# Altium PCB Nicla_BME688_ANNA_pcb.PcbDoc
Units mm, origin at the board's own origin, x right, y up, seen from the top; angles counter-clockwise.
Board outline 28.27 x 24.44 mm, 2 copper layers (Top Layer, Bottom Layer); 37 components, 28 nets, 159 pads, 82 vias.
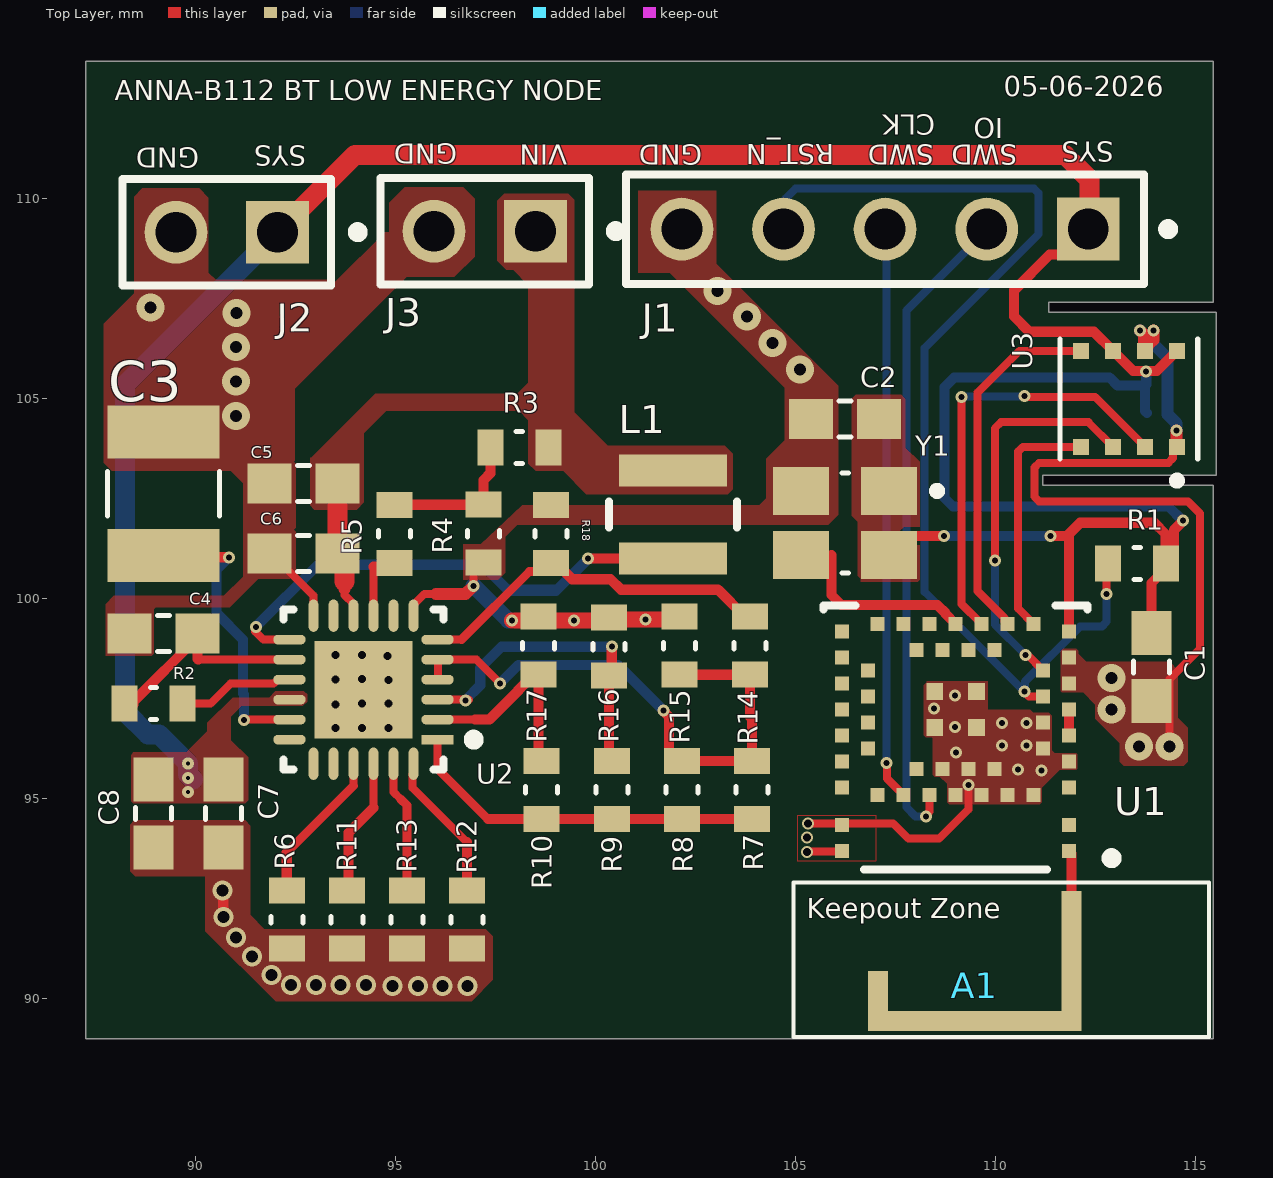
[diagram p0: Top Layer view]
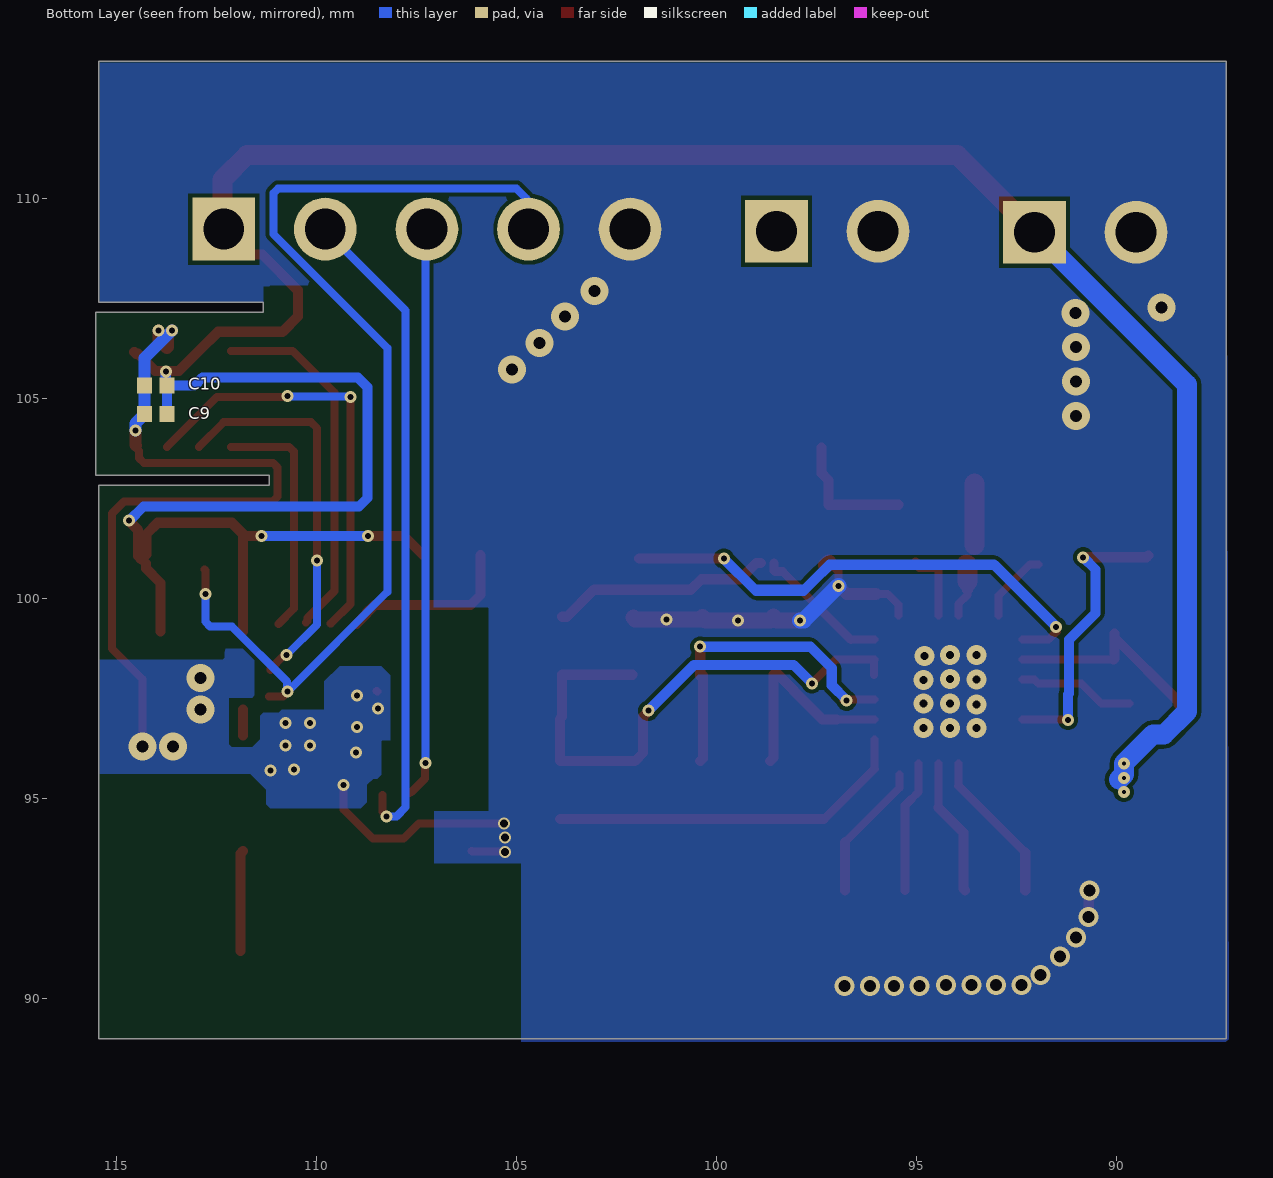
[diagram p1: Bottom Layer view, seen from below]
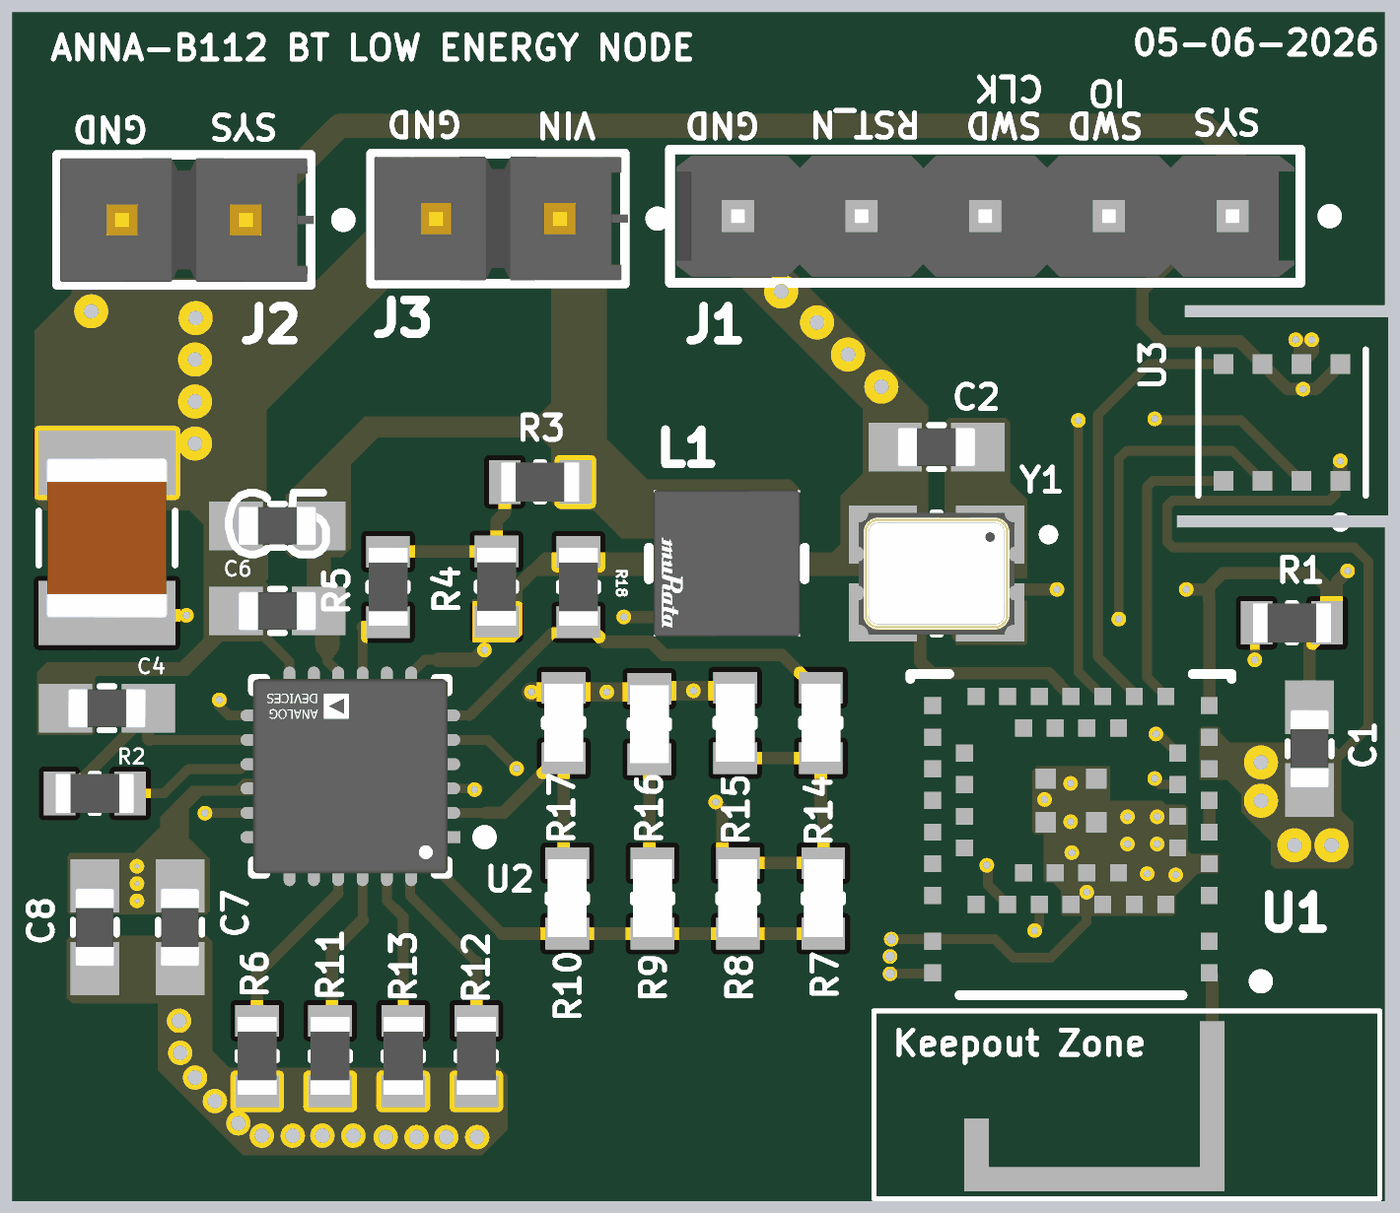
[diagram p2: 3D render of the assembled board from above, using the file's embedded part models]

## Layer stack, top to bottom
Top Solder: solder mask 0.0102, Solder Resist, Dk 3.5
Top Layer: signal copper 0.0356
Dielectric 1: dielectric 0.32, FR-4, Dk 4.8
Bottom Layer: signal copper 0.0356
Bottom Solder: solder mask 0.0102, Solder Resist, Dk 3.5

## Board outline
87.25,89 87.25,113.436 115.443,113.436 115.443,107.417 111.328,107.417 111.328,107.163 115.519,107.163 115.519,103.099 111.176,103.099 111.176,102.845 115.443,102.845 115.443,89

## Design rules (kind name [scope] priority, off if disabled: settings)
Clearance [All] p1: gap=0.1 ignorepadtopadclearanceinfootprint=FALSE except(0.2: Arc-Arc Arc-Track Track-Track)
ComponentClearance [All] p1: gap=0.2 collisioncheckmode=3 verticalgap=0.2 showdistances=FALSE
PlaneConnect [All] p1: planeconnectstyle=Direct reliefexpansion=0.508 reliefentries=4 reliefconductorwidth=0.254 reliefairgap=0.254
PolygonConnect [All] p1: connectstyle=Direct reliefconductorwidth=0.254 reliefentries=4 polygonreliefangle="90 Angle" airgapwidth=0.254
RoutingVias [All] p1: holewidth=0.15 width=0.3 viastyle="Through Hole" minholewidth=0.1 minwidth=0.254 maxholewidth=0.7 maxwidth=0.7
SMDNeckDown [All] p1: percent=90.000
ShortCircuit [All] p1: allowed=TRUE
SolderMaskExpansion [All] p1: expansion=0 istentingtop=FALSE
SupplyNets "Schematic Supply Nets_1" [InNet('GND')] p1: voltage=0.000
SupplyNets "Schematic Supply Nets" [InNet('SYS')] p2: voltage=0.000
UnRoutedNet [All] p1: checkbadconnections=TRUE
Width [All] p1: maxlimit=0.5 minlimit=0.1 preferedwidth=0.254 minimp=50.000000 maximp=50.000000 favimp=50.000000
26 further rules are at their usual default settings.

## Components (designator, comment, footprint, x,y, rotation, side; value= is the part's Value field where it differs from the comment)
A1 "AntennaStripANNA_B112" ChipAntennaANNAB112 109,88.1 r0 top
C1 "100n" CAPC1608X90 113.9,98.3 r90 top
C2 "100n" CAPC1608X90 106.238,104.5 r0 top
C3 "220u" CAPC3325X152N 89.198,102.631 r90 top
C4 "10u" CAPC1608X90 89.198,99.131 r0 top
C5 "0u1" CAPC1608X90 92.698,102.881 r180 top
C6 "4u7" CAPC1608X90 92.698,101.131 r180 top
C7 "4u7" CAPC1608X90 90.698,94.631 r270 top
C8 "0u1" CAPC1608X90 88.948,94.631 r270 top
C9 "100n" CAPC0603X33N 114.021,104.623 r180 bottom
C10 "100n" CAPC0603X33N 114.021,105.334 r180 bottom
J1 "22-28-4050" FP-22-28-4050-MFG 107.239,109.245 r180 top
J2 "TSW-102-12-T-S" FP-TSW-102-12-T-S-MFG 90.78,109.169 r180 top
J3 "TSW-102-12-T-S" FP-TSW-102-12-T-S-MFG 97.231,109.195 r180 top
L1 "22uH" FP-LQH3NPH_ME-MFG 101.93,102.108 r270 top
R1 "10K" RES_ERJU03J682V 113.538,100.889 r0 top
R2 "0K" RES_ERJU03J682V 88.948,97.381 r0 top
R3 "4.7M" RES_ERJU03J682V 98.095,103.784 r180 top
R4 "18M" RES_ERJU03J682V 97.198,101.631 r270 top
R5 "0K" RES_ERJU03J682V 94.971,101.625 r90 top
R6 "1K" RES_ERJU03J682V 92.284,91.984 r270 top
R7 "6M19" RES_ERJU03J682V 103.911,95.225 r90 top
R8 "5M9" RES_ERJU03J682V 102.159,95.225 r90 top
R9 "6M04" RES_ERJU03J682V 100.406,95.225 r90 top
R10 "5M9" RES_ERJU03J682V 98.654,95.225 r90 top
R11 "0K" RES_ERJU03J682V 93.784,91.984 r270 top
R12 "0K" RES_ERJU03J682V 96.784,91.984 r90 top
R13 "0K" RES_ERJU03J682V 95.284,91.984 r90 top
R14 "100K" RES_ERJU03J682V 103.861,98.831 r90 top
R15 "4M12" RES_ERJU03J682V 102.1,98.831 r90 top
R16 "4M02" RES_ERJU03J682V 100.338,98.806 r90 top
R17 "4M12" RES_ERJU03J682V 98.577,98.831 r90 top
R18 "4.7M" RES_ERJU03J682V 98.882,101.625 r90 top
U1 "ANNA-B112-00B" FP-ANNA-B112-00B-0 109,96.535 r180 top
U2 "ADP5091ACPZ-1-R7" FP-CP-24-14-IPC_C 94.198,97.732 r180 top
U3 "BME688" IC_BME688 113.335,105.004 r270 top
Y1 "S31805T-32.768K-R" OSC_S31805T-32.768K-R 106.238,101.9 r180 top

## Footprints (in the part's own frame and the unit in brackets; to place one, negate y for a bottom-side part, rotate by r counter-clockwise, add the part's x,y. Pads: shape width x height; smd on the part's side, far side on the other; paste and mask are expansions set on the pad)
CAPC0603X33N [mm]
  rect 0.38x0.4 smd: 1(-0.281,0) 2(0.281,0)
  body extent -0.3,-0.15 0.3,0.15, height 0.33
CAPC1608X90 [mm]
  rect 1.1x1 smd: 1(-0.85,0) 2(0.85,0)
  silkscreen extent -0.15,-0.45 0.15,0.45, body extent -0.8,-0.4 0.8,0.4, height 0.9
CAPC3325X152N [mm]
  rect 1.32x2.81 smd paste+0 mask+0.102: 1(-1.542,0) 2(1.542,0)
  silkscreen extent -0.56,-1.4 0.56,1.4, body extent -1.65,-1.25 1.65,1.25, height 1.52
ChipAntennaANNAB112 [mm] "chip antenna for internal antenna of ANNA-B112 when the chip is mounted on the corner"
  rect 0.5x1.5 smd: 1(-1.94,1.851)
  rect 4.84x0.5 smd: 1(0.73,1.351)
  rect 0.5x3 smd: 1(2.9,3.1)
FP-22-28-4050-MFG [mm]
  rect 1.57x1.57 hole 1.02 paste-2539.97 mask+0: 1(-5.08,0)
  round 1.57 hole 1.02 paste-2539.97 mask+0: 2(-2.54,0) 3(0,0) 4(2.54,0) 5(5.08,0)
  silkscreen extent -7.2,-1.37 6.47,1.37, body extent -6.58,-1.47 6.58,1.47, height 0.25
FP-ANNA-B112-00B-0 [mm]
  rect 0.35x0.35 smd paste+0 mask+0: 1(-2.84,2.84) 2(-2.84,2.19) 3(-2.84,1.248) 4(-2.84,0.598) 5(-2.84,-0.052) 6(-2.84,-0.702) 7(-2.84,-1.352) 8(-2.84,-2.002) 9(-2.84,-2.652) 10(-2.19,0.273) 11(-2.19,-0.377) 12(-2.19,-1.027) 13(-2.19,-1.677) 14(-1.95,-2.84) 15(-1.3,-2.84) 16(-0.65,-2.84) 17(0,-2.84) 18(0.65,-2.84) 19(1.3,-2.84) 20(1.95,-2.84) 21(-0.975,-2.19) 22(-0.325,-2.19) 23(0.325,-2.19) 24(0.975,-2.19) 25(2.84,-2.652) 26(2.84,-2.002) 27(2.84,-1.352) 28(2.84,-0.702) 29(2.84,-0.052) 30(2.84,0.598) 31(2.84,1.248) 32(2.84,2.19) 33(2.84,2.84) 34(2.19,-1.677) 35(2.19,-1.027) 36(2.19,-0.377) 37(2.19,0.273) 38(1.95,1.435) 39(1.3,1.435) 40(0.65,1.435) 41(0,1.435) 42(-0.65,1.435) 43(-1.3,1.435) 44(-1.95,1.435) 45(0.975,0.785) 46(0.325,0.785) 47(-0.325,0.785) 48(-0.975,0.785)
  rect 0.42x0.42 smd paste+0 mask+0: 49(-0.52,-0.252) 50(-0.52,-1.152) 51(0.52,-1.152) 52(0.52,-0.252)
  silkscreen extent -4.03,-3.3 3.3,3.3
FP-CP-24-14-IPC_C [mm]
  rect 0.81x0.242 smd paste+0 mask+0: 1(-1.851,1.25)
  rrect100% 0.81x0.242 smd paste+0 mask+0: 2(-1.851,0.75) 3(-1.851,0.25) 4(-1.851,-0.25) 5(-1.851,-0.75) 6(-1.851,-1.25) 13(1.851,-1.25) 14(1.851,-0.75) 15(1.851,-0.25) 16(1.851,0.25) 17(1.851,0.75) 18(1.851,1.25)
  rrect100% 0.242x0.81 smd paste+0 mask+0: 7(-1.25,-1.851) 8(-0.75,-1.851) 9(-0.25,-1.851) 10(0.25,-1.851) 11(0.75,-1.851) 12(1.25,-1.851) 19(1.25,1.851) 20(0.75,1.851) 21(0.25,1.851) 22(-0.25,1.851) 23(-0.75,1.851) 24(-1.25,1.851)
  rect 2.44x2.44 smd paste-1000 mask+0: 25(0,0)
  silkscreen extent -2.88,-2 2,2, body extent -2.36,-2.36 2.36,2.36, height 0.25
FP-LQH3NPH_ME-MFG [mm]
  rect 0.8x2.7 smd paste+0 mask+0: 1(-1.1,0) 2(1.1,0)
  silkscreen extent -0.32,-1.6 0.33,1.6, body extent -1.7,-1.7 1.7,1.7, height 0.25
FP-TSW-102-12-T-S-MFG [mm]
  rect 1.57x1.57 hole 1.02 paste-2539.97 mask+0: 1(-1.27,0)
  round 1.57 hole 1.02 paste-2539.97 mask+0: 2(1.27,0)
  silkscreen extent -3.4,-1.34 2.61,1.33, body extent -2.71,-1.44 2.71,1.44, height 0.25
IC_BME688 [mm]
  rect 0.4x0.4 smd: 1(1.2,1.2) 2(1.2,0.4) 3(1.2,-0.4) 4(1.2,-1.2) 5(-1.2,-1.2) 6(-1.2,-0.4) 7(-1.2,0.4) 8(-1.2,1.2)
  silkscreen extent -1.5,-1.72 2.14,1.72
OSC_S31805T-32.768K-R [mm]
  rect 1.4x1.2 smd: 1(-1.1,-0.8) 2(1.1,-0.8) 3(1.1,0.8) 4(-1.1,0.8)
  silkscreen extent -2.4,-1.25 0.08,1.25, body extent -1.6,-1.25 1.6,1.25, height 1.2
RES_ERJU03J682V [mm]
  rect 0.65x0.9 smd paste+0 mask+0.102: 1(-0.725,0) 2(0.725,0)
  silkscreen extent -0.08,-0.4 0.08,0.4, body extent -0.8,-0.4 0.8,0.4, height 0.45

## Part data
A1: "Schematic for Antenna Strip for ANNA-B112 INTERNAL Antenna when chip is mounted on corner"
C1 C2 C4 C5 C6 C7 C8 C9 C10: library part CC0603KRX7R9BB151, "CAPACITOR, 0603, 150PF, 50V; Capacitor Application:General Purpose; Dielectric Characteristic:X7R; Capacitance:150pF; Capacitance Tolerance:Â± 10%; Voltage Rating:50V; Capacitor Case Style:0603; Capacitor Mounting:SMD; Operating Temperature Range:-55Â°C t", Package="0603 Yageo", Check_prices=https://www.snapeda.com/parts/CC0603KRX7R9BB151/Yageo/view-part/?ref=eda, MF=Yageo, MP=CC0603KRX7R9BB151, SnapEDA_Link=https://www.snapeda.com/parts/CC0603KRX7R9BB151/Yageo/view-part/?ref=snap
C3: library part CC0603KRX7R9BB151, "1210", Package="0603 Yageo", Check_prices=https://www.snapeda.com/parts/CC0603KRX7R9BB151/Yageo/view-part/?ref=eda, MF=Yageo, MP=CC0603KRX7R9BB151, SnapEDA_Link=https://www.snapeda.com/parts/CC0603KRX7R9BB151/Yageo/view-part/?ref=snap
J1: library part CMP-00257-00278173-1, "22-28-4050 KK® 254 Breakaway Header, Vertical, 5 Circuits, Tin (Sn) Plating, Mating Pin Length 6.09mm", Color=Black, Contact Resistance=20mΩ, Current Rating=4A, Flammability Rating="UL94 V-0", Max Operating Temperature=75°C, Max Voltage Rating (DC)=250.25kV, Min Operating Temperature=0°C, Voltage Rating=250V, Connector Type="Male Pin", Contact Material=Brass, Contact Mating Length=6.096mm, Contact Plating=Tin, Gender=Male, Glow Wire Compliant=Non-compliant, Height=2.29mm, Housing Color=Black, Housing Material=Thermoplastic, Lead Free="Lead Free", Lead Pitch=2.54mm, Length=12.7mm, Mount="Through Hole", NexarPartId=278173, Number of Circuits=5, Number Of Contacts=5, Number of Positions=5, Number of Rows=1, Orientation=Vertical, Packaging=Bulk, Pitch=2.54mm, Radiation Hardening=No, REACH SVHC=Unknown, RoHS=Compliant, Schedule B=8536694040, Termination=Solder, Voltage Rating (DC)=250V, Width=2.49mm
J2 J3: library part CMP-02766-001444-1, "CONN HEADER VERT 2POS 2.54MM", Contact Material=Bronze, Contact Plating=Tin, Gender=Male, Mount="Through Hole", Number Of Contacts=2, Number of Rows=1, Packaging=Bulk, Pitch=2.54mm, Radiation Hardening=No, REACH SVHC="No SVHC", RoHS Compliant=Yes, Termination=Solder
L1: library part CMP-06042-009111-1, "Wire Wound Ferrite Inductor for Power Lines For Automotive 22μH ±20% 0.48Ω 860mA 1212", Case Code (Imperial)=1212, Case Code (Metric)=3030, Current Rating=860mA, DC Resistance (DCR)=480mR, Max Operating Temperature=85°C, Min Operating Temperature=-40°C, Ratings=AEC-Q200, Resistor Type=Wirewound, Saturation Current=570mA, Self Resonant Frequency=10MHz, Test Frequency=1MHz, Tolerance=20%, Case/Package=1212, Core Material=Ferrite, Inductance=22uH, Mount="Surface Mount", Packaging="Cut Tape", Shielding=Shielded
R1 R2 R5 R6 R11 R12 R13: library part ERJU02J364X, Package=None, Availability=Unavailable, MP=ERJU02J364X, Price=None
R3 R4 R7 R8 R9 R10 R14 R15 R16 R17 R18: library part ERJU02J364X, "0603", Package=None, Availability=Unavailable, MP=ERJU02J364X, Price=None
U1: library part CMP-207130-000009-1, "RF RECEIVER GFSK 2.4GHZ", Manufacturer=U-Blox, Max Frequency=2.4GHz, Max Supply Voltage=3.6V, Min Supply Voltage=1.7V, Nominal Supply Current=3.7mA, Package=SMD_MD_6MM5_6MM5, Receiving Current=5.4mA, Temperature="-40°C to +85°C", Temperature Range High=+85°C, Temperature Range Low=-40°C, Transmitting Current=5.3mA, Automotive=No, Category=UNK, ComponentLink2Description=Datasheet, ComponentLink2URL=https://www.u-blox.com/sites/default/files/ANNA-B112_DataSheet_%28UBX-18011707%29.pdf, Data Rate=2Mbits/s, Device Class L1="Integrated Circuits (ICs)", Device Class L2="RF Semiconductors and Devices", Device Class L3=Transceivers, Digikey Description="RF RECEIVER GFSK 2.4GHZ", Height=1.25mm, Interface=I2C,SPI,UART,I2S, Lead Free=Yes, Manufacturer Part Number=ANNA-B112-00B, Number Of Adc Channels=8, Number Of Gpio=25, Octopart=https://octopart.com/anna-b112-00b-u-blox-97577862, RoHS=TRUE, Sensitivity=-91dBm
U2: library part CMP-09132-000010-1, "IC BATT CHG MULTI-CHEM 24LFCSP", Manufacturer="Analog Devices Inc.", Max Supply Voltage=3.3V, Min Supply Voltage=0.08V, Nominal Supply Current=0.51-0.76uA, Output Current=150mA, Output Voltage=1.5-3.6V, Package=CP-24-14, Temperature="-40°C to +125°C", Temperature Range High=+125°C, Temperature Range Low=-40°C, Automotive=No, Category=IC, ComponentLink2Description=Datasheet, ComponentLink2URL=https://www.analog.com/media/en/technical-documentation/data-sheets/ADP5091-5092.pdf, Device Class L1="Integrated Circuits (ICs)", Device Class L2="Power Management ICs", Device Class L3="Battery Management", Digikey Description="IC BATT CHG MULTI-CHEM 24LFCSP", Height=0.8mm, Ipc Land Pattern Name=QFN50P400X400X75-24, Lead Free=Yes, Manufacturer Part Number=ADP5091ACPZ-1-R7, Mouser Description="Ultralow Power Energy Harvester PMU with MPPT and Charge Management", Octopart=https://octopart.com/adp5091acpz-1-r7-analog+devices-71032930, RoHS=TRUE, Standoff Height=0.02mm
U3: "Gas sensor measuring relative humidity, barometric pressure, ambient temperature and gas (VOC)", Package=None, Availability=Unavailable, MP=BME688, Price=None
Y1: Package=None, Availability=Unavailable, MP=S31805T-32.768K-R, Price=None

## Via types
v1: diameter 0.3, hole 0.15, Top Layer to Bottom Layer, 38 vias
v2: diameter 0.7, hole 0.3, Top Layer to Bottom Layer, 13 vias
v3: diameter 0.5, hole 0.3, Top Layer to Bottom Layer, 13 vias
v4: diameter 0.5, hole 0.2, Top Layer to Bottom Layer, 12 vias
v5: diameter 0.3, hole 0.1, Top Layer to Bottom Layer, 3 vias
v6: diameter 0.3, hole 0.2, Top Layer to Bottom Layer, 3 vias

## Nets (pads, with @x,y where several pads share a name; then routed paths per layer and width w, separated by ;. In a path a pad name is that pad's centre, name@x,y a point inside that pad or via, vN(x,y) a via of type N, cw(c..) or ccw(c..) an arc to the next point about the centre after c; other vN are vias at no path point)
ANT_INT: U1.5 U1.6 | length 0.6
  Top Layer w0.254: U1.5 U1.6
ANT_Strip: U1.1 | length 2.5
  Top Layer w0.254: U1.1 111.9,93.635 111.9,91.2
CS_BME: U1.16 U3.2 | length 11
  Top Layer w0.2: v1(109.15,105.049) 109.15,99.875 109.634,99.391 U1.16@109.651,99.391 ; v1(110.719,105.08) 110.744,105.054 112.484,105.054 U3.2
  Bottom Layer w0.2: v1(109.15,105.049) 109.166,105.064 110.703,105.064 v1(110.719,105.08)
DIS_SW: R11.1 U2.22 | length 3.4
  Top Layer w0.2: 94.448,94.779 U2.22
  Top Layer w0.254: R11.1 93.825,92.75 93.825,94.155 94.448,94.779
GND: C1.1 C2.1 C3.2 C4.1 C5.2 C6.2 C7.2 C8.2 C9.1 C10.1 J1.5 J2.2 J3.2 R4.2 R6.2 R11.2 R12.1 R13.1 R15.2 R16.2 R17.2 R18.2 U1.4 U1.7 U1.8 U1.10 U1.11 U1.32 U1.33 U1.41 U1.42 U1.43 U1.44 U1.46 U1.47 U1.48 U1.49 U1.50 U1.51 U1.52 U2.7 U2.12 U2.25 U3.1 U3.7 Y1.2 | length 35.9
  Top Layer w0.2: C6.2@91.948,100.863 92.166,100.863 92.948,100.081 U2.12 ; U2.7 95.448,99.856 95.719,100.127 96.012,100.127 ; v1(96.952,100.33) 96.952,100.681 97.177,100.906 R4.2 ; v6(105.283,93.675) 105.289,93.681 106.101,93.681 U1.33@106.121,93.701 ; v6(105.308,94.386) 107.442,94.386 107.823,94.005 108.585,94.005 109.322,94.742 109.322,95.326 v1@109.347,95.352 ; U1.51 U1.51@108.494,97.701 ; v2@114.325,96.418 114.351,96.444 114.351,97.993 115.113,98.755 115.113,102.133 114.808,102.438 111.09,102.438 110.973,102.555 110.973,103.286 111.09,103.403 114.318,103.403 114.435,103.521 114.435,103.704 U3.1
  Top Layer w0.254: v3(90.678,92.71) 90.691,92.697 90.691,92.062 v3(90.703,92.05)
  Top Layer w0.3: 96.012,100.127 96.749,100.127 v1@96.926,100.305 ; v1(113.614,106.705) 113.716,106.604 U3.7@113.716,106.299 ; U3.7@113.741,106.274 113.944,106.477 v1(113.944,106.705) ; U3.1@114.51,103.835 114.529,103.854 v1(114.529,104.216)
  Top Layer w0.4: R4.2 R4.2@97.257,100.848 ; v1(97.917,99.466) 98.487,99.466 R17.2 ; R17.2@98.603,99.531 98.667,99.466 v1(99.466,99.466) 100.274,99.466 R16.2@100.351,99.544 ; R16.2 100.378,99.492 102.035,99.492 R15.2@102.074,99.531
  Bottom Layer w0.3: v1(113.614,106.705) 114.302,106.018 C10.1 C9.1@114.302,104.65 ; C9.1 114.302,104.613 114.529,104.386 v1(114.529,104.216)
  Bottom Layer w0.4: v1(96.952,100.33) 97.815,99.466 v1(97.917,99.466)
  other v1: 109.322,95.352 111.15,95.707 110.566,95.733 109.017,96.164 110.16,96.342 110.769,96.342 108.991,96.799 110.16,96.901 110.769,96.901 108.458,97.257 108.991,97.587 101.244,99.492
  other v2: 113.589,96.317 114.351,96.317 112.903,97.231 112.903,98.019 91.008,104.572 91.008,105.435 105.105,105.74 91.008,106.299 104.419,106.401 103.784,107.061 91.021,107.15 88.875,107.29 103.048,107.696
  other v3: 94.923,90.318 95.558,90.318 96.168,90.318 96.803,90.318 92.38,90.348 93.015,90.348 93.624,90.348 94.259,90.348 91.897,90.602 91.415,91.059 91.008,91.542
  other v4: 93.497,96.774 94.158,96.774 94.818,96.774 93.497,97.367 94.158,97.384 94.818,97.384 94.818,97.968 93.497,97.985 94.158,97.993 94.793,98.577 93.497,98.603 94.158,98.603
  other v6: 105.283,94.031
MINOP: R6.1 U2.21 | length 3.9
  Top Layer w0.2: 93.948,95.333 U2.21
  Top Layer w0.218: 92.278,93.662 93.948,95.333
  Top Layer w0.254: 92.278,93.662 92.278,92.709 R6.1
MISO_BME: U1.15 U3.5 | length 9.1
  Top Layer w0.2: U1.15@110.266,99.416 110.259,99.416 110.225,99.45 110.225,99.525 109.55,100.2 109.55,105.156 110.598,106.204 U3.5
MOSI_BME: U1.13 U3.3 | length 9.8
  Top Layer w0.2: v1(109.982,100.965) 109.982,104.267 110.134,104.419 112.319,104.419 U3.3 ; v1(110.744,98.603) 110.763,98.584 110.818,98.584 111.15,98.252 U1.13@111.15,98.222
  Bottom Layer w0.2: v1(109.982,100.965) 109.982,99.365 v1(110.744,98.603)
MPPT: R5.1 U2.9 | length 1.8
  Top Layer w0.2: U2.9 94.448,100.804
  Top Layer w0.254: 94.448,100.804 94.919,100.804 R5.1@95.021,100.906
MPPT_VOLTAGE_DIVIDER: R3.2 R4.1 R5.2 | length 3.2
  Top Layer w0.254: 95.448,102.356 R4.1 97.198,102.972 97.37,103.143 R3.2
REF: R7.1 R8.1 R9.1 R10.1 U2.1 | length 9.1
  Top Layer w0.2: 96.05,95.757 U2.1
  Top Layer w0.218: 96.05,95.757 97.307,94.5
  Top Layer w0.254: 97.307,94.5 R10.1 R9.1 R8.1 R7.1
REG_D0: R12.2 U2.24 | length 3.5
  Top Layer w0.2: U2.24@95.428,95.606 95.428,95.275 96.784,93.919
  Top Layer w0.254: R12.2 96.784,93.919
REG_D1: R13.2 U2.23 | length 3.3
  Top Layer w0.2: U2.23 94.948,95.176 95.117,95.007
  Top Layer w0.218: 95.117,95.007 95.284,94.841 R13.2
REG_FB: R2.2 U2.15 | length 2.9
  Top Layer w0.2: R2.2 90.375,97.381 90.876,97.882 91.952,97.882 92.052,97.982 U2.15
REG_OUT: C4.2 R2.1 U2.14 | length 5.5
  Top Layer w0.2: 90.068,98.482 U2.14
  Top Layer w0.254: R2.1 88.223,97.358 88.443,97.358 88.443,97.429 C4.2@90.048,99.035 ; C4.2 C4.2@90.048,99.035 ; 90.068,98.482 90.048,98.502 C4.2@90.048,99.035
RESET_N: J1.4 R1.1 U1.12 | length 25.9
  Top Layer w0.2: v1(110.719,97.688) 110.719,97.679 110.836,97.562 U1.12 ; v1(112.776,100.127) 112.776,100.711 R1.1@112.801,100.736
  Bottom Layer w0.2: J1.4@104.75,110.007 105.004,110.261 108.001,110.261 ; 108.026,110.261 110.957,110.261 111.074,110.144 111.074,109.118 108.229,106.274 108.229,100.178 v1(110.719,97.688) 110.738,97.708 110.738,97.936 112.116,99.314 112.659,99.314 112.776,99.431 v1(112.776,100.127)
SCLK_BME: U1.14 U3.4 | length 6.1
  Top Layer w0.2: U1.14 110.566,99.759 110.566,103.686 110.683,103.804 U3.4
SETBK: R9.2 R16.1 U2.3 | length 8.3
  Top Layer w0.2: U2.3 v1@96.822,97.482
  Top Layer w0.218: v1(96.749,97.46) 96.774,97.46 96.797,97.482 v1@96.822,97.482
  Top Layer w0.254: R9.2 100.338,96.017 R16.1 100.406,98.081 v1(100.406,98.806)
  Bottom Layer w0.254: v1(96.749,97.46) 96.749,97.472 97.117,97.84 97.117,98.272 97.65,98.806 v1(100.406,98.806)
SETHYST: R14.2 R18.1 U2.6 | length 9
  Top Layer w0.2: U2.6 96.646,98.982
  Top Layer w0.218: 96.646,98.982 98.348,100.685 98.541,100.685 98.564,100.707 R18.1@98.564,100.9
  Top Layer w0.254: R18.1 99.007,100.9 99.413,100.494 100.373,100.494 100.639,100.228 103.064,100.228 103.736,99.556 R14.2
SETPG: R7.2 R8.2 R14.1 R15.1 U2.4 U2.5 | length 14.1
  Top Layer w0.2: U2.4@96.063,98.095 96.063,98.469 U2.5 97.021,98.482 v1@97.561,97.942
  Top Layer w0.254: v1(101.702,97.206) 101.702,97.193 101.836,97.059 101.836,96.148 102.034,95.95 R7.2 103.911,97.003 103.861,97.053 R14.1 R15.1
  Bottom Layer w0.254: v1(97.612,97.892) 98.073,98.352 100.555,98.352 v1(101.702,97.206)
SETSD: R10.2 R17.1 U2.2 | length 5.2
  Top Layer w0.2: U2.2 96.982,96.982
  Top Layer w0.254: 96.982,96.982 97.345,96.982 98.066,97.704 98.066,97.72 98.452,98.106 R17.1 98.577,96.026 R10.2
SUPERCAP: C3.1 U2.17 | length 7.3
  Top Layer w0.2: v1(91.211,96.977) 91.217,96.982 U2.17
  Top Layer w0.254: C3.1 89.246,101.041 v1(90.83,101.041)
  Bottom Layer w0.254: v1(90.83,101.041) 90.526,100.736 90.526,99.644 91.186,98.984 91.186,97.635 91.211,97.61 v1(91.211,96.977)
SW: L1.2 U2.13 | length 14.1
  Top Layer w0.2: v1@91.491,99.187 91.695,98.982 U2.13
  Top Layer w0.254: v1(99.814,101.008) L1.2
  Bottom Layer w0.254: v1(91.507,99.305) 93.059,100.857 97.17,100.857 97.586,100.441 ; 99.009,100.203 97.824,100.203 97.586,100.441 ; v1(99.814,101.008) 99.035,100.228 97.799,100.228 97.586,100.441
SWDCLK: J1.3 U1.39 | length 14.3
  Top Layer w0.2: v1(107.271,95.905) 107.29,95.886 107.29,95.51 107.625,95.175 107.644,95.175 U1.39@107.671,95.148
  Bottom Layer w0.2: J1.3 107.271,109.214 v1(107.271,95.905)
SWDIO: J1.2 U1.40 | length 16.3
  Top Layer w0.2: v1(108.255,94.564) 108.255,94.591 108.35,94.686 U1.40
  Bottom Layer w0.2: v1(108.255,94.564) 108.001,94.564 107.772,94.793 107.772,107.213 109.347,108.788 J1.2@109.347,109.245
SYS: C1.2 C2.2 C7.1 C8.1 C9.2 C10.2 J1.1 J2.1 R1.2 U1.9 U2.16 U3.6 U3.8 Y1.1 Y1.4 | length 75.1
  Top Layer w0.254: Y1.4 107.811,101.573 108.71,101.573 v1(108.712,101.575) ; v1(111.368,101.575) 111.836,101.575 111.836,101.346 ; U1.9 111.84,101.346 ; 111.84,101.629 112.116,101.905 113.97,101.905 114.249,101.625 R1.2@114.249,101.117 ; J1.1 112.154,109.41 112.154,109.103 111.661,108.609 111.354,108.609 110.465,107.72 110.465,107.061 110.846,106.68 112.458,106.68 U3.6 ; U3.6@112.966,106.172 113.44,105.698 113.758,105.698 v1(113.767,105.689) 113.775,105.698 114.029,105.698 114.462,106.131 114.513,106.131 U3.8@114.554,106.172 ; C1.2@113.9,99.187 113.9,100.401 114.263,100.764 R1.2 ; R1.2@114.376,100.99 114.458,101.072 114.458,101.72 114.681,101.943 v1(114.681,101.956)
  Top Layer w0.5: J2.1 93.98,111.1 111.735,111.1 112.344,110.49 J1.1@112.344,109.499
  Bottom Layer w0.254: v1(108.712,101.575) v1(111.368,101.575) ; v1@113.767,105.639 113.767,105.361 C10.2 ; C9.2@113.787,104.648 113.74,104.696 C10.2 ; v1(114.681,101.956) 114.325,102.311 108.937,102.311 108.723,102.525 108.723,105.294 108.966,105.537 112.852,105.537 113.055,105.334 C10.2
  Bottom Layer w0.5: v5@89.941,95.481 89.814,95.608 v5(89.814,95.885) 89.089,96.61 88.812,96.61 88.24,97.183 88.24,105.359 J2.1
  other v5: 89.814,95.174 89.814,95.529
VIN: C5.1 C6.1 J3.1 L1.1 R3.1 U2.10 | length 2.9
  Top Layer w0.2: 93.726,100.254 93.726,100.101 93.948,99.879 U2.10
  Top Layer w0.3: 93.726,100.254 93.726,100.432
  Top Layer w0.5: C6.1@93.548,101.346 C5.1 ; 93.726,100.432 93.726,100.838 C6.1@93.751,100.863
XTALin: U1.17 Y1.3 | length 4.4
  Top Layer w0.254: 105.9,101.1 105.9,100.1 106.15,99.85 108.546,99.85 108.752,99.644 108.752,99.623 U1.17
pads on no net: A1.1 U1.2 U1.3 U1.18 U1.19 U1.20 U1.21 U1.22 U1.23 U1.24 U1.25 U1.26 U1.27 U1.28 U1.29 U1.30 U1.31 U1.34 U1.35 U1.36 U1.37 U1.38 U1.45 U2.8 U2.11 U2.18 U2.19 U2.20

## Polygon pours and split planes (outlines as drawn)
GND on Top Layer "GND_L01_P008" (solid, pour order 8): 111.684,98.755 111.633,98.704 111.633,97.688 111.658,97.663 112.192,97.663 112.497,97.358 112.497,97.003 113.106,96.393 113.106,95.936 113.208,95.834 114.706,95.834 114.808,95.936 114.808,96.774 114.554,97.028 114.554,98.222 114.351,98.425 112.268,98.425 112.065,98.628 112.065,98.704 112.014,98.755
GND on Top Layer "GND_L01_P005" (solid, pour order 5): 96.698,101.371 97.13,101.371 98.171,102.337 98.527,102.337 98.958,102.337 104.089,102.337 104.267,102.514 104.267,103.505 104.724,103.962 104.724,105.283 101.854,108.153 101.067,108.153 101.067,110.211 103.022,110.211 103.022,108.382 106.07,105.334 106.07,103.937 106.07,102.108 105.816,101.854 98.044,101.854 97.739,101.549 97.739,100.66 97.561,100.482 96.698,100.482
GND on Top Layer "GND_L01_P014" (solid, pour order 14): 105.054,94.59 107.01,94.59 107.01,93.447 105.054,93.447
SYS on Top Layer "SYS_L01_P011" (solid, pour order 11): 88.392,95.021 88.392,94.945 88.443,94.894 91.237,94.894 91.313,94.971 91.313,96.037 90.881,96.469 90.881,97.053 91.161,97.333 92.685,97.333 92.786,97.434 92.786,97.612 92.71,97.688 91.999,97.688 91.846,97.536 90.932,97.536 90.297,96.901 90.297,96.698 89.764,96.164 88.443,96.164 88.392,96.088 88.392,96.063
SYS on Top Layer "SYS_L01_P010" (solid, pour order 10): 106.553,100.584 106.629,100.508 106.629,100.432 108.052,100.432 108.102,100.482 108.102,103.429 107.747,103.784 107.747,105.004 107.645,105.105 106.502,105.105 106.401,105.004 106.401,102.083 106.553,101.93 106.553,100.609
VIN on Top Layer "VIN_L01_P004" (solid, pour order 4): 97.536,109.957 97.714,110.134 99.314,110.134 99.466,109.982 99.466,104.673 100.305,103.835 103.226,103.835 103.429,103.632 103.429,102.743 103.302,102.616 99.771,102.616 99.187,103.2 98.501,103.2 98.323,103.378 98.323,104.47 98.095,104.699 94.767,104.699 94.209,104.14 94.209,102.413 94.031,102.235 92.964,102.235 92.862,102.337 92.862,103.53 92.888,103.53 94.488,105.131 98.044,105.131 98.323,105.41 98.323,107.848 97.942,108.229 97.765,108.229 97.536,108.458
GND on Top Layer "GND_L01_P003" (solid, pour order 3): 88.367,93.193 88.494,93.066 90.246,93.066 90.246,91.694 91.999,89.941 96.901,89.941 97.434,90.475 97.434,91.567 97.257,91.745 91.719,91.745 91.364,92.1 91.364,94.336 91.237,94.463 88.468,94.463 88.367,94.361 88.367,94.132
GND on Top Layer "GND_L01_P002" (solid, pour order 2): 108.28,97.917 108.28,97.942 109.804,97.942 109.804,97.231 110.871,97.231 110.947,97.155 111.328,97.155 111.404,97.079 111.404,96.215 111.481,96.139 112.014,96.139 112.039,96.114 112.039,95.758 112.014,95.733 111.608,95.733 111.15,95.275 111.15,94.92 111.1,94.869 108.839,94.869 108.788,94.92 108.788,95.377 108.61,95.555 108.483,95.555 108.433,95.606 108.433,96.52 108.407,96.545 108.255,96.545 108.204,96.596 108.204,97.841
GND on Top Layer "GND_L01_P006" (solid, pour order 6): 87.757,98.577 88.9,98.577 88.951,98.628 88.951,99.746 89.002,99.797 90.856,99.797 91.567,100.508 92.354,100.508 92.507,100.66 92.507,101.676 92.456,101.727 92.507,101.778 92.507,103.378 92.456,103.429 92.481,103.454 92.481,105.258 95.275,108.052 96.469,108.052 96.977,108.56 96.977,110.007 96.698,110.287 95.225,110.287 94.844,109.906 94.844,109.169 94.742,109.169 93.497,107.925 93.447,107.975 90.5,107.975 90.322,108.153 90.322,110.033 90.094,110.261 88.671,110.261 88.468,110.058 88.468,107.645 87.706,106.883 87.706,103.403 87.909,103.2 90.881,103.2 91.186,102.895 91.186,100.559 90.703,100.076 87.96,100.076 87.757,99.873
GND on Bottom Layer "GND_L02_P013" (solid, remove dead copper, pour order 13): 87.3,113.411 87.376,113.411 115.418,113.411 115.418,88.925 115.367,88.875 115.316,88.925 87.198,88.925 87.25,113.411

## Other copper
Bottom Layer:
  pour cut-out: 108.179,107.848 108.179,99.746 108.255,99.822 112.293,99.822 112.293,98.527 112.344,98.476 115.672,98.527 115.646,98.552 115.646,98.704 115.646,102.946 111.277,102.946 111.227,102.997 111.328,103.099 111.328,107.823 111.176,107.823 111.15,107.848 111.176,107.823 111.15,107.848
  pour cut-out: 112.217,99.797 112.217,98.806 112.268,98.755 111.557,98.755 111.557,97.587 111.608,97.536 112.192,97.536 112.192,96.368 112.116,96.291 111.608,96.291 111.404,96.495 111.404,97.079 111.328,97.155 110.947,97.155 110.871,97.231 109.804,97.231 109.804,97.942 109.423,98.323 108.382,98.323 108.153,98.095 108.153,96.469 108.356,96.469 108.382,96.444 108.382,95.606 108.483,95.504 108.585,95.504 108.737,95.352 108.737,94.92 108.89,94.767 111.15,94.767 111.252,94.869 111.252,95.225 111.658,95.631 114.91,95.631 115.824,95.631 115.824,88.798 104.877,88.798 104.877,93.396 107.061,93.396 107.061,94.691 105.689,94.691 105.689,99.771 105.715,99.797
Multi-Layer:
  pour cut-out: 111.176,102.845 111.176,107.404 115.443,107.404 115.443,102.845

## Silkscreen, mask and mechanical layers (free items; w line width, h text height)
Top Overlay:
  lines w0.1: 104.953,89.052 115.341,89.052 115.341,92.913 104.953,92.913 104.953,89.052
  text "05-06-2026" at 110.209,112.571 h0.5
  text "ANNA-B112 BT LOW ENERGY NODE" at 87.984,112.47 h0.5
  text "CLK" at 108.493,112.111 h0.5 r180
  text "IO" at 110.187,112.016 h0.5 r180
  text "SYS" at 112.955,111.431 h0.5 r180
  text "GND" at 96.547,111.381 h0.5 r180
  text "RST_N" at 105.97,111.373 h0.5 r180
  text "VIN" at 99.29,111.355 h0.5 r180
  text "GND" at 102.668,111.355 h0.5 r180
  text "SWD" at 108.46,111.355 h0.5 r180
  text "SWD" at 110.542,111.355 h0.5 r180
  text "SYS" at 92.762,111.33 h0.5 r180
  text "GND" at 90.095,111.279 h0.5 r180
  text "Keepout Zone" at 105.281,92.011 h0.5
Top Courtyard:
  lines w0.254: 114.275,102.743 112.344,102.743 111.354,102.743 111.354,103.099 115.418,103.099 115.418,107.061 114.395,107.061 112.351,107.061 111.277,107.061 111.277,107.417 112.338,107.417 114.408,107.417 115.443,107.417 115.443,113.436 ; 114.351,102.743 114.617,102.743 115.151,102.743 115.418,102.743 115.418,89.078 115.443,89.052
Mechanical 15:
  lines w0.254: 115.443,89 87.25,89 87.25,113.436 115.443,113.436